# Altium PCB PCB1.PcbDoc
Units mil, origin at the board's own origin, x right, y up, seen from the top; angles counter-clockwise.
Board outline 6000 x 5615 mil, 2 copper layers (Top Layer, Bottom Layer); 144 components, 99 nets, 418 pads, 52 vias.
Unrouted connection lines stored in the file: 1.
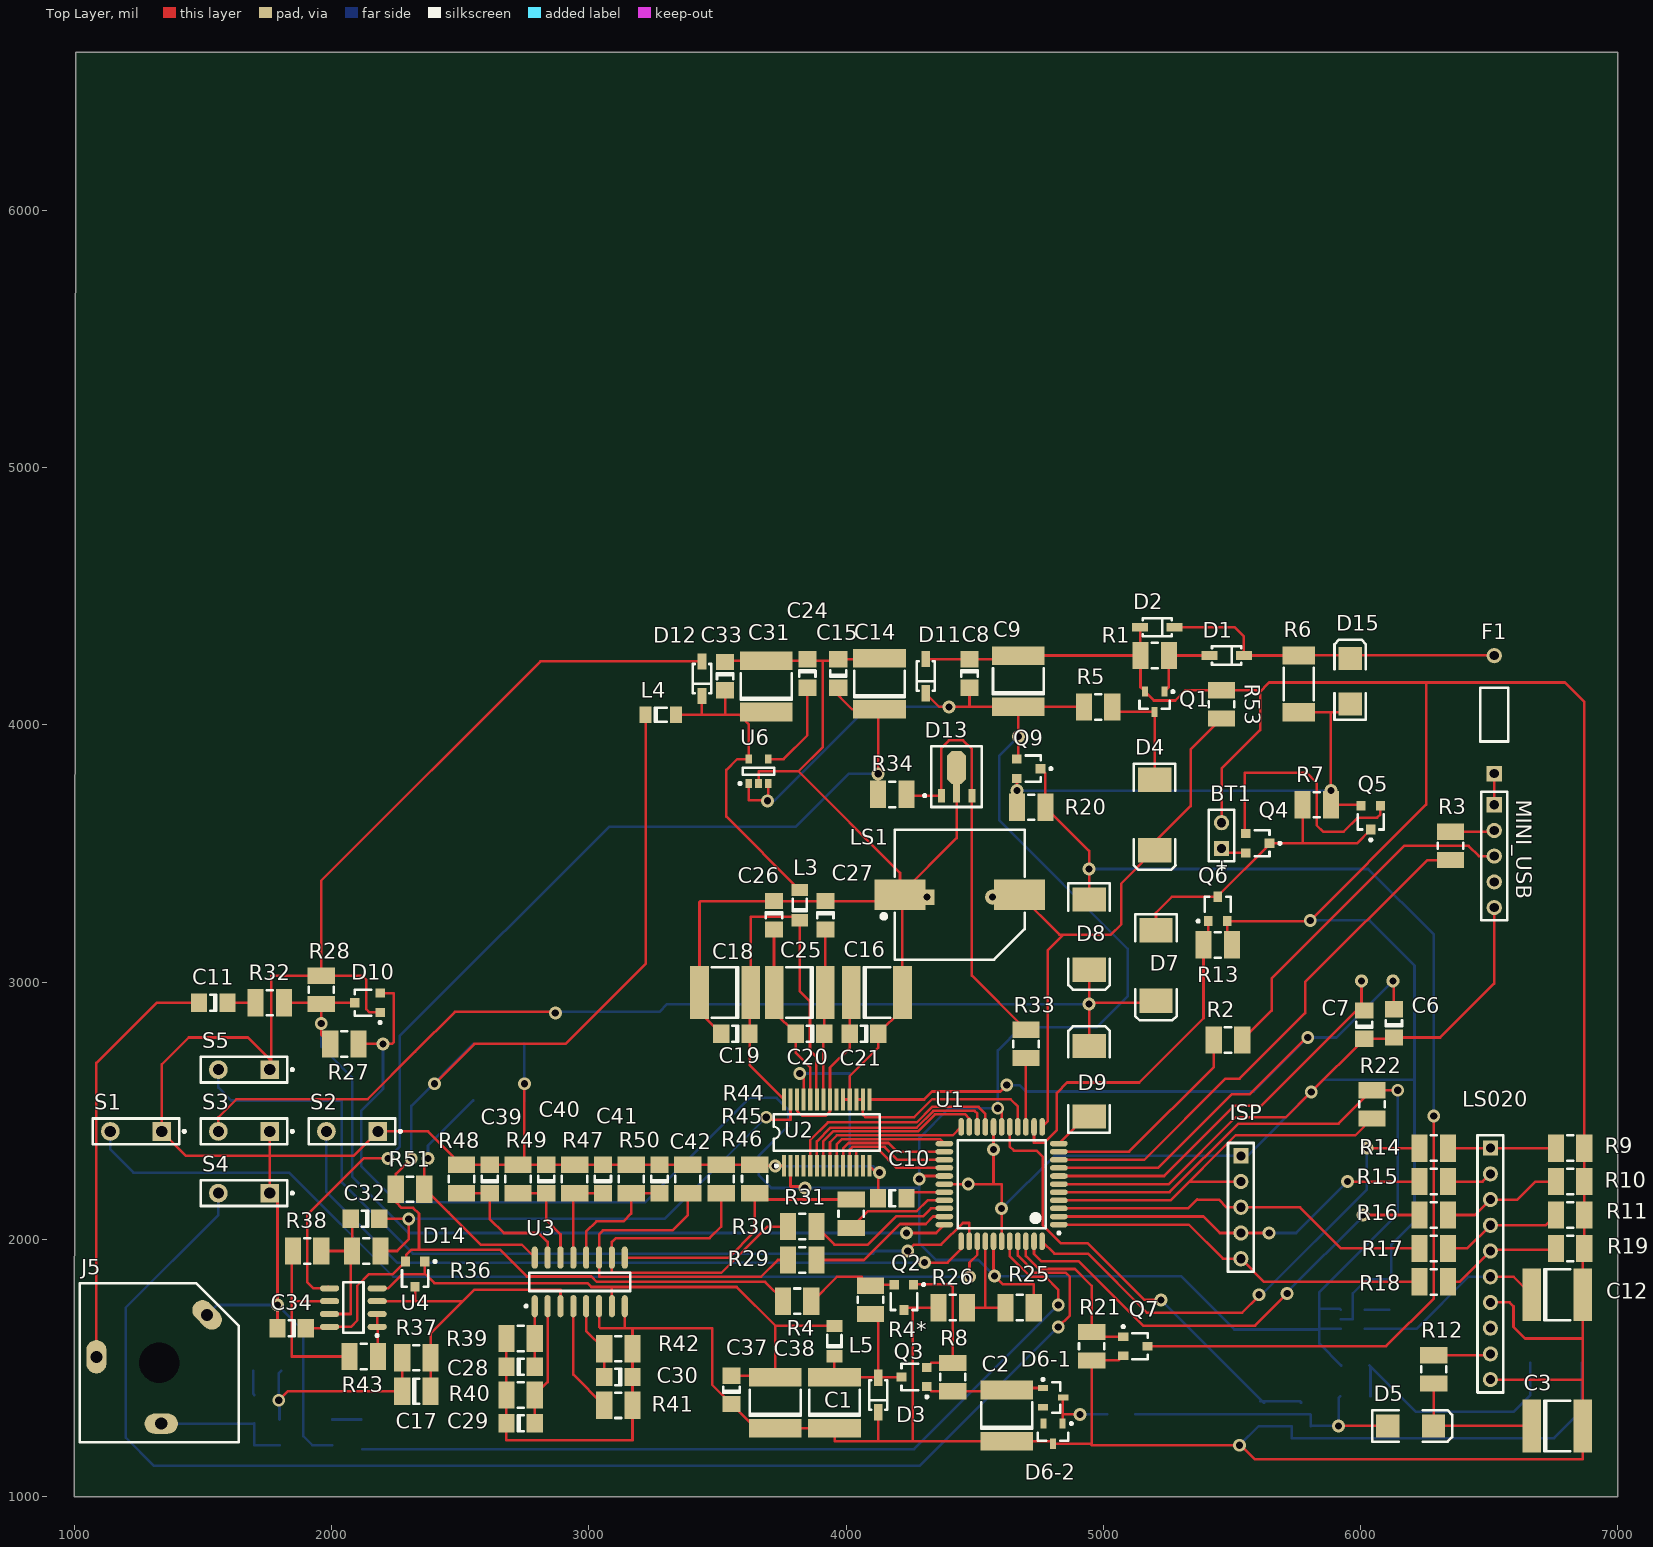
[diagram p0: Top Layer view]
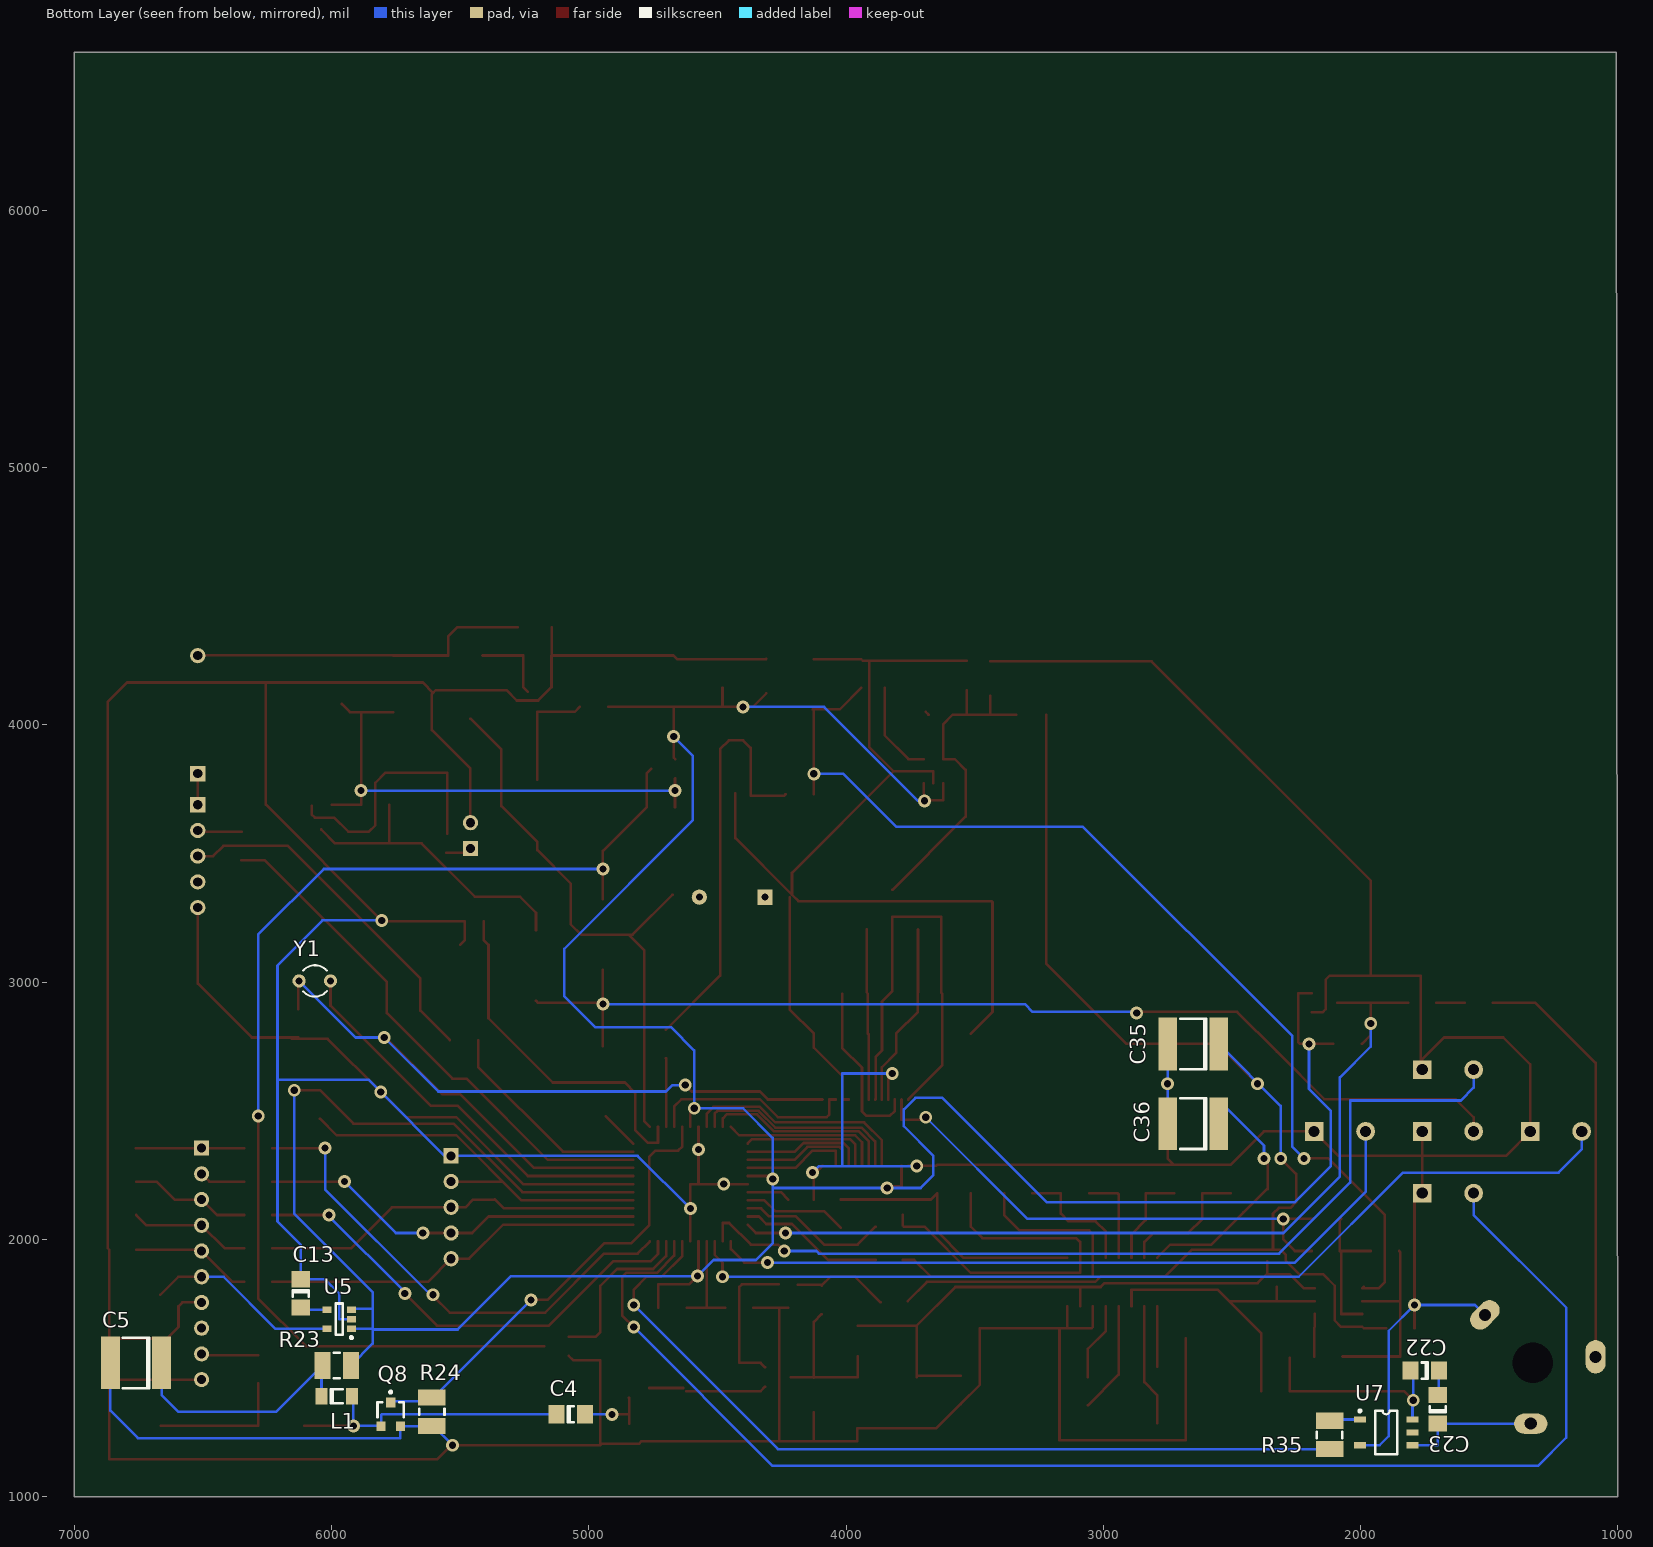
[diagram p1: Bottom Layer view, seen from below]

## Layer stack, top to bottom
Top Layer: signal copper 1.4
Dielectric: dielectric 12.6, FR-4, Dk 4.8
Bottom Layer: signal copper 1.4

## Board outline
1000,1000 7000,1000 7000,6615 1005,6615

## Design rules (kind name [scope] priority, off if disabled: settings)
Clearance [All vs InNet('No Net')] p1: gap=10
ComponentClearance [All] p1: gap=5 collisioncheckmode=3 verticalgap=100000 showdistances=FALSE
Height [All] p1: minheight=0 maxheight=10000 prefheight=5000
HoleToHoleClearance [All] p1: gap=5 allowstackedmicrovias=TRUE
MinimumSolderMaskSliver [All] p1: minsoldermaskwidth=5
PlaneClearance [All] p1: clearance=40
PlaneConnect [All] p1: planeconnectstyle=Relief reliefexpansion=20 reliefentries=4 reliefconductorwidth=20 reliefairgap=20
PolygonConnect [All] p1: connectstyle=Relief reliefconductorwidth=20 reliefentries=4 polygonreliefangle="90 Angle"
RoomDefinition Sheet1 [InComponentClass('Sheet1')] p1: confinementstyle=ConfineIn formatcopy=TRUE lockcomponents=FALSE outline 1000,1130 7195,1130 7195,6595 1000,6595
RoutingVias [All] p1: holewidth=28 width=50 viastyle="Through Hole" minholewidth=28 minwidth=50 maxholewidth=28 maxwidth=50
SilkToSilkClearance [All] p1: silktosilkclearance=5
SilkscreenOverComponentPads [All] p1: minsilkscreentomaskgap=5
SolderMaskExpansion [All] p1: expansion=5
TestPointUsage [All] p1: valid=0 allowmultiple=FALSE
Testpoint [All] p1: side=0 testpointundercomponent=FALSE minsize=40 maxsize=100 preferedsize=60 minholesize=0 maxholesize=40 preferedholesize=32 testpointgrid=1 style=0 order=0-112345678
Width [All] p1: maxlimit=20 minlimit=5 preferedwidth=10
16 further rules are at their usual default settings.

## Components (designator, comment, footprint, x,y, rotation, side; value= is the part's Value field where it differs from the comment)
BT1 "3.7V" BAT-2 5460,3570 r90 top
C1 "Cap Pol3" 2220 3955,1365 r90 top
C2 "Cap Pol3" 2220 4625,1315 r90 top
C3 "Cap Pol3" 2220 6765,1275 r0 top
C4 "Cap Semi" C1206 5070,1320 r180 bottom
C5 "Cap Pol3" 2220 6760,1520 r0 bottom
C6 "Cap Semi" C1206 6130,2840 r90 top
C7 "Cap Semi" C1206 6015,2835 r90 top
C8 "Cap Semi" C1206 4480,4200 r270 top
C9 "Cap Pol3" 2220 4670,4170 r90 top
C10 "Cap Semi" C1206 4180,2160 r0 top
C11 "Cap Semi" C1206 1540,2920 r180 top
C12 "Cap Pol3" 2220 6765,1785 r0 top
C13 "Cap Semi" C1206 6120,1790 r270 bottom
C14 "Cap Pol3" 2220 4130,4160 r90 top
C15 "Cap Semi" C1206 3970,4200 r90 top
C16 "Cap Pol3" 2220 4120,2960 r0 top
C17 "4.5-20pF" C1210 2330,1410 r0 top
C18 "Cap Pol3" 2220 3530,2960 r180 top
C19 "Cap Semi" C1206 3570,2800 r180 top
C20 "Cap Semi" C1206 3860,2800 r180 top
C21 "Cap Semi" C1206 4070,2800 r180 top
C22 "Cap Semi" C1206 1750,1490 r0 bottom
C23 "Cap Semi" C1206 1700,1340 r90 bottom
C24 "Cap Semi" C1206 3850,4200 r270 top
C25 "Cap Pol3" 2220 3820,2960 r180 top
C26 "Cap Semi" C1206 3720,3260 r270 top
C27 "Cap Semi" C1206 3920,3260 r270 top
C28 "Cap Semi" C1206 2735,1505 r0 top
C29 "Cap Semi" C1206 2735,1285 r0 top
C30 "Cap Semi" C1206 3115,1465 r180 top
C31 "Cap Pol3" 2220 3690,4150 r90 top
C32 "Cap Semi" C1206 2130,2080 r180 top
C33 "Cap Semi" C1206 3530,4190 r270 top
C34 "Cap Semi" C1206 1845,1655 r180 top
C35 "Cap Pol3" 2220 2650,2760 r0 bottom
C36 "Cap Pol3" 2220 2650,2450 r0 bottom
C37 "Cap Semi" C1206 3555,1415 r90 top
C38 "Cap Pol3" 2220 3725,1365 r90 top
C39 "Cap Semi" C1206 2615,2235 r90 top
C40 "Cap Semi" C1206 2835,2235 r90 top
C41 "Cap Semi" C1206 3055,2235 r90 top
C42 "Cap Semi" C1206 3275,2235 r90 top
D1 "MMSZ4V7T1" 425 5480,4270 r180 top
D2 "MMSZ5V6T1" 425 5210,4380 r180 top
D3 "MMSZ3V3T1" 425 4125,1395 r90 top
D4 "Diode" SMC 5200,3650 r270 top
D5 "MBR0520" SMB 6195,1275 r0 top
D6-1 "BAT54" SOT23_L 4805,1385 r0 top
D6-2 "BAT54" SOT23_L 4805,1245 r270 top
D7 "Diode" SMC 5205,3065 r270 top
D8 "Diode" SMC 4945,3185 r270 top
D9 "Diode" SMC 4945,2615 r90 top
D10 "BAV99" SOT-23 2140,2920 r90 top
D11 "MMSZ5V1T1" 425 4310,4190 r90 top
D12 "MMSZ3V3T1" 425 3440,4180 r90 top
D13 "TL431CPK" PK03 4430,3780 r0 top
D14 "BAV99" SOT-23 2325,1865 r180 top
D15 "MBR0520" SMB 5960,4170 r90 top
F1 "Fuse 1" PIN-W2/E2.8 6520,4040 r90 top
ISP "Header 5" HDR1X5 5535,2325 r270 top
J5 "Phonejack3" JACK/6-V3 1330,1520 r270 top
L1 "Inductor" 3261 5980,1390 r180 bottom
L3 "Inductor" 3261 3820,3300 r90 top
L4 "Inductor" 3261 3280,4040 r0 top
L5 "Inductor" 3261 3955,1605 r90 top
LS1 "Buzzer" ABSM-1574 4210,3340 r0 top
LS020 "Header 10" HDR1X10 6505,2355 r270 top
MINI_USB "Header 5" HDR1X5 6520,3690 r270 top
Q1 "BC847" SOT23_L 5200,4090 r270 top
Q2 "BC 857" SOT-23B 4225,1775 r180 top
Q3 "BC 857" SOT-23B 4265,1465 r90 top
Q4 "IRLML6402" SOT23#1 5600,3540 r270 top
Q5 "IRLML6402" SOT23#1 6040,3640 r180 top
Q6 "2N7002" SOT23#2 5445,3285 r0 top
Q7 "2N7002" SOT23#2 5125,1585 r270 top
Q8 "IRLML2402" SOT23#1 5770,1320 r180 bottom
Q9 "IRLML6402" SOT23#1 4710,3830 r270 top
R1 "Res3" 3225[1210] 5200,4270 r0 top
R2 "Res3" 3225[1210] 5485,2775 r180 top
R3 "Res3" 3225[1210] 6350,3530 r270 top
R4 "Res3" 3225[1210] 3810,1760 r180 top
R4* "Res3" 3225[1210] 4095,1765 r90 top
R5 "Res3" 3225[1210] 4980,4070 r180 top
R6 "Res3" 6332[2512] 5760,4160 r270 top
R7 "Res3" 3225[1210] 5830,3690 r0 top
R8 "Res3" 3225[1210] 4415,1465 r90 top
R9 "Res3" 3225[1210] 6815,2355 r180 top
R10 "Res3" 3225[1210] 6815,2225 r180 top
R11 "Res3" 3225[1210] 6815,2095 r180 top
R12 "Res3" 3225[1210] 6285,1495 r90 top
R13 "Res3" 3225[1210] 5445,3145 r0 top
R14 "Res3" 3225[1210] 6285,2355 r180 top
R15 "Res3" 3225[1210] 6285,2225 r180 top
R16 "Res3" 3225[1210] 6285,2095 r180 top
R17 "Res3" 3225[1210] 6285,1965 r180 top
R18 "Res3" 3225[1210] 6285,1835 r180 top
R19 "Res3" 3225[1210] 6815,1965 r180 top
R20 "Res3" 3225[1210] 4720,3680 r0 top
R21 "Res3" 3225[1210] 4955,1585 r270 top
R22 "Res3" 3225[1210] 6045,2525 r270 top
R23 "Res3" 3225[1210] 5980,1510 r0 bottom
R24 "Res3" 3225[1210] 5610,1330 r90 bottom
R25 "Res3" 3225[1210] 4675,1735 r0 top
R26 "Res3" 3225[1210] 4415,1735 r0 top
R27 "Res3" 3225[1210] 2050,2760 r0 top
R28 "Res3" 3225[1210] 1960,2970 r270 top
R29 "Res3" 3225[1210] 3830,1920 r180 top
R30 "Res3" 3225[1210] 3830,2050 r180 top
R31 "Res3" 3225[1210] 4020,2100 r90 top
R32 "Res3" 3225[1210] 1760,2920 r180 top
R33 "Res3" 3225[1210] 4700,2760 r90 top
R34 "Res3" 3225[1210] 4180,3730 r180 top
R35 "Res3" 3225[1210] 2120,1240 r270 bottom
R36 "Res3" 3225[1210] 2135,1955 r180 top
R37 "Res3" 3225[1210] 2330,1540 r0 top
R38 "Res3" 3225[1210] 1905,1955 r180 top
R39 "Res3" 3225[1210] 2735,1615 r0 top
R40 "Res3" 3225[1210] 2735,1395 r0 top
R41 "Res3" 3225[1210] 3115,1355 r180 top
R42 "Res3" 3225[1210] 3115,1575 r180 top
R43 "Res3" 3225[1210] 2125,1545 r180 top
R44 "Res3" 3225[1210] 3385,2235 r270 top
R45 "Res3" 3225[1210] 3515,2235 r270 top
R46 "Res3" 3225[1210] 3645,2235 r270 top
R47 "Res3" 3225[1210] 2945,2235 r90 top
R48 "Res3" 3225[1210] 2505,2235 r90 top
R49 "Res3" 3225[1210] 2725,2235 r90 top
R50 "Res3" 3225[1210] 3165,2235 r90 top
R51 "Res3" 3225[1210] 2305,2195 r180 top
R53 "Res3" 3225[1210] 5460,4080 r90 top
S1 "SW-PB" SPST-2 1240,2420 r180 top
S2 "SW-PB" SPST-2 2080,2420 r180 top
S3 "SW-PB" SPST-2 1660,2420 r180 top
S4 "SW-PB" SPST-2 1660,2180 r180 top
S5 "SW-PB" SPST-2 1660,2660 r180 top
U1 "ATmega32-16AI" 44A_N 4605,2215 r180 top
U2 "AD9280" SSOP28 3925,2415 r0 top
U3 "74VHC4051M" M16A_N 2965,1835 r90 top
U4 "MCP6022IM" M08A_L 2085,1735 r180 top
U5 "LP3985IM5-285" MF05A_L 5970,1690 r0 bottom
U6 "LP3985IM5-3.0" MF05A_L 3660,3820 r90 top
U7 "Optoisolator2" SOP5(6) 1900,1250 r270 bottom
Y1 "15MHz" R38 6065,3005 r90 bottom

## Footprints (in the part's own frame and the unit in brackets; to place one, negate y for a bottom-side part, rotate by r counter-clockwise, add the part's x,y. Pads: shape width x height; smd on the part's side, far side on the other; paste and mask are expansions set on the pad)
44A_N [mm] "Thin QFP, 44-Leads, Body 10x10mm, Pitch 0.8mm, IPC Medium Density"
  oval 1.75x0.55 smd: 1(-5.65,4) 2(-5.65,3.2) 3(-5.65,2.4) 4(-5.65,1.6) 5(-5.65,0.8) 6(-5.65,0) 7(-5.65,-0.8) 8(-5.65,-1.6) 9(-5.65,-2.4) 10(-5.65,-3.2) 11(-5.65,-4) 23(5.65,-4) 24(5.65,-3.2) 25(5.65,-2.4) 26(5.65,-1.6) 27(5.65,-0.8) 28(5.65,0) 29(5.65,0.8) 30(5.65,1.6) 31(5.65,2.4) 32(5.65,3.2) 33(5.65,4)
  oval 0.55x1.75 smd: 12(-4,-5.65) 13(-3.2,-5.65) 14(-2.4,-5.65) 15(-1.6,-5.65) 16(-0.8,-5.65) 17(0,-5.65) 19(1.6,-5.65) 20(2.4,-5.65) 21(3.2,-5.65) 22(4,-5.65) 34(4,5.65) 35(3.2,5.65) 36(2.4,5.65) 37(1.6,5.65) 38(0.8,5.65) 39(0,5.65) 40(-0.8,5.65) 41(-1.6,5.65) 42(-2.4,5.65) 43(-3.2,5.65) 44(-4,5.65)
  oval 0.55x1.75 smd paste+0 mask+0.127: 18(0.8,-5.65)
  silkscreen extent -5.77,-4.35 4.35,4.95, body extent -5,-5 5,5, height 1.2
425 [mm] "SOD-123; 2 Leads; Body 2.7 x 1.6 mm, (LxW)"
  rect 1.6x0.85 smd: 1(-1.7,0) 2(1.7,0)
  silkscreen extent -1.45,-0.9 1.45,0.9
2220 [mm] "Chip Capacitor; Body 5.7 x 5.0 mm (LxW typ)"
  rect 1.85x5.2 smd: 1(-2.525,0) 2(2.525,0)
  silkscreen extent -1.3,-2.5 1.3,2.5
3225[1210] [mm] "Chip Resistor; Body 3.2 x 2.5 mm (LxW typ)"
  rect 1.6x2.7 smd: 1(-1.4,0) 2(1.4,0)
  silkscreen extent -0.3,-1.25 0.3,1.25
3261 [mm] "3216 Chip; Chip Inductor; Body 3.2 x 1.6 mm (LxW typ)"
  rect 1.2x1.6 smd: 1(-1.5,0) 2(1.5,0)
  silkscreen extent -0.6,-0.7 0.6,0.7
6332[2512] [mm] "Chip Resistor; Body 6.3 x 3.2 mm (LxW typ)"
  rect 1.8x3.2 smd: 1(-2.8,0) 2(2.8,0)
  silkscreen extent -1.6,-1.5 1.6,1.5
ABSM-1574 [mm] "Magnetic Transducer Buzzer"
  rect 5x3 smd: 1(0,0) 2(11.8,0)
  rect 1.5x1.5 hole 0.7: 1A(2.65,-0.24)
  round 1.5 hole 0.7: 2A(9.15,-0.24)
  silkscreen extent -1.83,-6.4 12.3,6.4
BAT-2 [mm] "Multicell Battery; 2 Leads"
  rect 1.5x1.5 hole 0.9: 1(-1.27,0)
  round 1.5 hole 0.9: 2(1.27,0)
  silkscreen extent -2.54,-1.27 2.54,1.27
C1206 [mm] "Chip Capacitor; Body 3.2 x 1.6 mm (LxW typ)"
  rect 1.6x1.8 smd: 1(-1.4,0) 2(1.4,0)
  silkscreen extent -0.3,-0.8 0.3,0.8
C1210 [mm] "Chip Capacitor; Body 3.2 x 2.5 mm (LxW typ)"
  rect 1.6x2.7 smd: 1(-1.4,0) 2(1.4,0)
  silkscreen extent -0.3,-1.25 0.3,1.25
HDR1X5 [mm] "Connector; Header; 5 Position"
  rect 1.5x1.5 hole 0.9: 1(0,0)
  round 1.5 hole 0.9: 2(2.54,0) 3(5.08,0) 4(7.62,0) 5(10.16,0)
  silkscreen extent -1.27,-1.27 11.43,1.27
HDR1X10 [mm] "Connector; Header; 10 Position"
  rect 1.5x1.5 hole 0.9: 1(0,0)
  round 1.5 hole 0.9: 2(2.54,0) 3(5.08,0) 4(7.62,0) 5(10.16,0) 6(12.7,0) 7(15.24,0) 8(17.78,0) 9(20.32,0) 10(22.86,0)
  silkscreen extent -1.27,-1.27 24.13,1.27
JACK/6-V3 [mm] "Connector; Jack Socket, 1/4\" [6.5mm], Thru-Hole, 3 Position, Vertical, Body 15.7 x 15.7 x 31 mm (WxTxH)"
  oval 2x3.3 hole 1.2: 1(6,0.2)
  oval 3.3x2 hole 1.2: 3(-0.6,-6.2)
  oval 2x3.3 hole 1.2 rot 135: 5(-4.738,4.738)
  round 3.7 hole 4: MH1(0,0)
  silkscreen extent -7.85,-7.85 7.85,7.85
M08A_L [mm] "SOIC, 8-Leads, Body 4.9x3.9mm, Pitch 1.27mm, IPC High Density"
  oval 1.9x0.6 smd: 1(-2.35,1.905) 2(-2.35,0.635) 3(-2.35,-0.635) 4(-2.35,-1.905) 5(2.35,-1.905) 6(2.35,-0.635) 7(2.35,0.635) 8(2.35,1.905)
  silkscreen extent -2.48,-2.5 1,2.88, body extent -2,-2.5 2,2.5, height 1.75
M16A_N [mm] "SOIC, 16-Leads, Body 9.9x3.9mm, Pitch 1.27mm, IPC Medium Density"
  oval 2.2x0.6 smd: 1(-2.4,4.445) 2(-2.4,3.175) 3(-2.4,1.905) 4(-2.4,0.635) 5(-2.4,-0.635) 6(-2.4,-1.905) 7(-2.4,-3.175) 8(-2.4,-4.445) 9(2.4,-4.445) 10(2.4,-3.175) 11(2.4,-1.905) 12(2.4,-0.635) 13(2.4,0.635) 14(2.4,1.905) 15(2.4,3.175) 16(2.4,4.445)
  silkscreen extent -2.52,-5 0.9,5.42, body extent -1.95,-4.95 1.95,4.95, height 1.75
MF05A_L [mm] "SOT23, 5-Leads, Body 2.9x1.6mm, Pitch 0.95mm, Lead Span 2.8mm, IPC High Density"
  rect 0.9x0.65 smd: 1(-1.2,0.95) 2(-1.2,0) 3(-1.2,-0.95) 4(1.2,-0.95) 5(1.2,0.95)
  silkscreen extent -1.32,-1.55 0.35,1.95, body extent -0.9,-1.55 0.9,1.55, height 1.22
PIN-W2/E2.8 [mm] "Fuse; 2 Leads"
  rect 1.5x1.5 hole 0.9: 1(-5.825,0)
  round 1.5 hole 0.9: 2(5.825,0)
  silkscreen extent -2.65,-1.4 2.65,1.4
PK03 [mm] "SOT-89; Body 4.6 x 4.25 mm, inc. leads (LxW max)"
  oct 1.9x3.3 smd: 0(0,1.388)
  rect 0.7x1.35 smd: 1(-1.5,-1.388) 3(1.5,-1.388)
  rect 0.7x1.8 smd: 2(0,-1.162)
  silkscreen extent -3.27,-2.51 2.5,3.49
R38 [mm] "Crystal, Thru-Hole; 2 Leads; Body 3.1 x 8.2 mm (Dia.xH)"
  round 1.3 hole 0.7: 1(0,1.55) 2(0,-1.55)
  silkscreen extent -1.55,-1.19 1.55,1.17
SMB [mm] "DO-214-AA/SMB; 2 C-Bend Leads; Body 5.3 x 3.6 mm, inc. leads (LxW)"
  rect 2.3x2.3 smd: 1(-2.25,0) 2(2.25,0)
  silkscreen extent -3.8,-1.55 4.1,1.55
SMC [mm] "DO-214-AB/SMC; 2 C-Bend Leads; Body 7.9 x 5.9 mm, inc. leads (LxW)"
  rect 2.4x3.3 smd: 1(-3.475,0) 2(3.475,0)
  silkscreen extent -5.07,-2.05 5.43,2.05
SOP5(6) [mm] "Small Outline; 6 Leads (1 Absent); Body Width 4.4 mm; Pitch 1.27 mm"
  rect 0.6x1.2 smd: 1(-1.27,-2.6) 3(1.27,-2.6) 4(1.27,2.6) 5(0,2.6) 6(-1.27,2.6)
  silkscreen extent -2.24,-2.72 2.15,1.1
SOT23#1 [mm] "SOT-23; 3 Leads; Body 3.1 x 2.5 mm, inc. leads (LxW max), Alternate Lead Configuration"
  rect 0.9x0.95 smd: 1(0,1.175) 2(0.95,-1.175) 3(-0.95,-1.175)
  silkscreen extent -1.3,-0.3 1.3,2.33
SOT23#2 [mm] "SOT-23; 3 Leads; Body 3.0 x 2.5 mm, inc. leads (LxW max)"
  rect 0.85x1 smd: 1(-0.95,-1.2) 2(0.95,-1.2) 3(0,1.2)
  silkscreen extent -2.05,-1.32 1.28,1.2
SOT23_L [mm] "SOT23, 3-Leads, Body 2.9x1.3mm, Pitch 0.95mm, Lead Span 2.3mm, IPC High Density"
  rect 1x0.6 smd: 1(-1,0.95) 2(-1,-0.95) 3(1,0)
  silkscreen extent -1.12,-1.5 0.7,1.92, body extent -0.7,-1.5 0.7,1.5, height 1.1
SOT-23 [mm] "SOT-23; 3 Leads; Body 3.0 x 2.6 mm, inc. leads (LxW max)"
  rect 0.9x0.95 smd: 1(-0.95,-1.25) 2(0.95,-1.25) 3(0,1.25)
  silkscreen extent -2.07,-1.38 1.3,1.25
SOT-23B [mm] "SOT-23; 3 Leads; Body 3.0 x 2.6 mm, inc. leads (LxW max)"
  rect 0.9x0.95 smd: 1(-0.95,-1.25) 2(0.95,-1.25) 3(0,1.25)
  silkscreen extent -2.08,-1.37 1.3,1.25
SPST-2 [mm] "Circuit Breaker; 2 Leads"
  rect 1.85x1.85 hole 1.1: 1(-2.54,0)
  round 1.85 hole 1.1: 2(2.54,0)
  silkscreen extent -4.89,-1.27 4.28,1.27
SSOP28 [mm] "SSOP, Plastic; 28 Leads; Body Width 5.3 mm; Pitch 0.65 mm"
  rect 0.4x2.15 smd: 1(-4.225,-3.275) 2(-3.575,-3.275) 3(-2.925,-3.275) 4(-2.275,-3.275) 5(-1.625,-3.275) 6(-0.975,-3.275) 7(-0.325,-3.275) 8(0.325,-3.275) 9(0.975,-3.275) 10(1.625,-3.275) 11(2.275,-3.275) 12(2.925,-3.275) 13(3.575,-3.275) 14(4.225,-3.275) 15(4.225,3.275) 16(3.575,3.275) 17(2.925,3.275) 18(2.275,3.275) 19(1.625,3.275) 20(0.975,3.275) 21(0.325,3.275) 22(-0.325,3.275) 23(-0.975,3.275) 24(-1.625,3.275) 25(-2.275,3.275) 26(-2.925,3.275) 27(-3.575,3.275) 28(-4.225,3.275)
  silkscreen extent -5.25,-3.4 5.25,1.8

## Part data
BT1: library part Battery, "Multicell Battery"
C1 C2 C3 C5 C9 C12 C14 C16 C18 C25 C31 C35 C36 C38: "Polarized Capacitor (Surface Mount)"
C4 C6 C7 C8 C10 C11 C13 C15 C19 C20 C21 C22 C23 C24 C26 C27 C28 C29 C30 C32 C33 C34 C37 C39 C40 C41 C42: "Capacitor (Semiconductor SIM Model)"
C17: library part "Cap Var", "Variable or Adjustable Capacitor"
D1 D2 D3 D11 D12: "Surface Mount Silicon Zener Diode"
D4 D7 D8 D9: "Default Diode"
D5 D15: library part "D Schottky", "Schottky Diode"
D6-1 D6-2: "Schottky Barrier Diode"
D10 D14: "Silicon Switching Diode Array for High-Speed Switching"
D13: "Adjustable Precision Shunt Regulator"
F1: "Fuse"
ISP: library part "Header 5X2", "Header, 5-Pin, Dual row"
J5: "Jack Socket, 1/4\" [6.5mm], Thru-Hole, Vertical, 3-Conductor Open Circuit (Non-Normalling)"
LS1: "Magnetic Transducer Buzzer"
LS020: "Header, 10-Pin"
MINI_USB: "Header, 5-Pin"
Q1: "NPN General-purpose Transistor"
Q2 Q3: library part PNP, "PNP Bipolar Transistor"
Q4 Q5 Q9: library part MOSFET-P, "P-Channel MOSFET"
Q6 Q7 Q8: library part MOSFET-N, "N-Channel MOSFET"
R1 R2 R3 R4 R4* R5 R6 R7 R8 R9 R10 R11 R12 R13 R14 R15 R16 R17 R18 R19 R20 R21 R22 R23 R24 R25 R26 R27 R28 R29 R30 R31 R32 R33 R34 R35 R36 R37 R38 R39 R40 R41 R42 R43 R44 R45 R46 R47 R48 R49 R50 R51 R53: "Resistor"
S1 S2 S3 S4 S5: "Switch"
U1: "8-Bit AVR Microcontroller with 32K Bytes of In-System Programmable Flash Memory"
U3: "8-Channel Analog Multiplexer"
U4: library part LMC6022IM, "Low Power CMOS Dual Operational Amplifier"
U5 U6: "Micropower, 150mA Low-Noise Ultra Low-Dropout CMOS Voltage Regulator"
U7: "5 Pin Mini Flat Pack Optocoupler"
Y1: library part XTAL, "Crystal Oscillator"

## Via types
v1: diameter 50, hole 28, Top Layer to Bottom Layer, 52 vias

## Nets (pads, with @x,y where several pads share a name; then routed paths per layer and width w, separated by ;. In a path a pad name is that pad's centre, name@x,y a point inside that pad or via, vN(x,y) a via of type N, cw(c..) or ccw(c..) an arc to the next point about the centre after c; other vN are vias at no path point)
+2.8V: C12.1 LS020.6 U5.5 | length 761.2
  Top Layer w10: LS020.6 6595.59,1855 C12.1
  Bottom Layer w10: U5.5 6217.6,1652.6 6420,1855 LS020.6
+3V: C34.1 C35.1 D14.2 L4.1 R4.2 R51.2 U4.8 | length 5126
  Top Layer w10: C34.1 U4.8@1987.48,1655 ; U4.8 2075,1660 2100,1685 2100,1820 2145,1865 2238.39,1865 D14.2 2290,1916.61 2290,1940 2310,1960 2340,1960 ; v1(2310,2315) 2249.88,2254.88 R51.2 2249.88,2145.12 2272.41,2122.59 2317.41,2122.59 2340,2100 2340,1960 ; v1(2400,2605) 2555,2760 2910,2760 3220.94,3070.94 L4.1 ; R4.2@3760,1760 3685,1835 3030.99,1835 3010,1855.99 2759.01,1855.99 2701.46,1913.54 2655,1960 2340,1960
  Bottom Layer w10: v1(2310,2315) 2310,2519.41 C35.1
-3V: C1.2 D3.2 L5.1 Q3.3 R4*.1 | length 602.1
  Top Layer w10: L5.1 C1.2 D3.2@4125,1464.41 ; R4*.1 4125,1679.88 D3.2@4125,1464.41 ; D3.2 D3.2@4125,1464.41 ; Q3.3@4215.2,1464.41 D3.2@4125,1464.41
ADC_EN: U1.15 U2.16 U2.17 | length 811.5
  Top Layer w10: U2.17 U2.16 4065.75,2484.25 4075,2475 4265,2475 4335,2545 4640,2545 4667.99,2517.01 U1.15
BAT: R25.1 R26.2 U1.37 | length 405.3
  Top Layer w10: R26.2 R25.1 ; 4542.01,1737.01 U1.37
CH_OK: D4.2 LS1.2 LS1.2A R53.1 U1.12 | length 2219.4
  Top Layer w10: LS1.2 4829.57,3185 4845,3185 ; U1.12 4785,2459.96 4785,3125 4845,3185 ; R53.1 5340,3904.88 5340,3685 5200,3545 D4.2 5070,3383.19 5070,3225 5030,3185 4845,3185
CH_ON: Q6.1 R13.1 U1.13 | length 1390.9
  Top Layer w10: U1.13 4730.98,2375.98 4770.98,2375.98 4820,2425 4820,2570 4860,2610 5140,2610 5389.88,2859.88 R13.1 5407.6,3162.72 Q6.1
CLK: ISP.3 R17.2 U1.3 | length 1496.3
  Top Layer w10: U1.3 5329.49,2120.51 5365,2156.02 5366.02,2155 5450,2155 5480,2125 ISP.3 5765,2125 5925,1965 R17.2
CS: R16.2 U1.43 | length 1847
  Top Layer w10: U1.43 4730.98,1944.02 4760,1915 4905,1915 5155,1665 5590,1665 v1(5715,1790) ; v1(6010,2095) R16.2
  Bottom Layer w10: v1(5715,1790) 5715,1795 6010,2090 v1(6010,2095)
DATA: ISP.5 R18.2 U1.1 | length 1494.6
  Top Layer w10: U1.1 5332.48,2057.52 5465,1925 ISP.5 5625,1835 R18.2
DC_AC: R35.2 U1.40 | length 3307
  Top Layer w10: U1.40@4636.5,1981.59 U1.40 4636.5,1936.5 4717.99,1855 4775,1855 4825,1805 v1(4825,1745)
  Bottom Layer w10: R35.2 4264.88,1184.88 v1(4825,1745)
DOWN: S4.2 U1.41 | length 5503.5
  Top Layer w10: U1.41 4667.99,1937.01 4735,1870 4855,1870 4870,1855 4870,1705 v1(4825,1660)
  Bottom Layer w10: S4.2@1560,2185 1560,2095 1200,1735 1200,1230 1310,1120 4285,1120 v1(4825,1660)
GND: BT1.2 C1.1 C2.1 C3.2 C5.2 C6.1 C7.1 C8.1 C9.2 C10.1 C12.2 C13.1 C14.2 C15.2 C16.2 C18.2 C19.2 C21.1 C24.1 C26.1 C27.1 C28.1 C29.1 C30.1 C31.2 C33.1 C34.2 C35.2 C36.2 C37.1 C38.1 C39.2 C40.2 C41.2 C42.2 D2.2 D3.1 D6-2.3 D10.1 D11.2 D12.2 D13.2 ISP.1 J5.5 LS1.1 LS1.1A LS020.7 LS020.10 MINI_USB.5 Q1.2 Q2.3 Q6.2 Q7.2 Q8.2 R1.1 R9.1 R10.1 R11.1 R13.2 R19.1 R21.2 R24.1 R26.1 R28.1 R39.1 R40.1 R41.1 R42.1 R44.1 R45.1 R46.1 R47.2 R48.2 R49.2 R50.2 R53.2 S1.1 S2.1 S3.1 S4.1 S5.1 U1.6 U1.18 U1.28 U1.39 U2.1 U2.14 U2.18 U2.19 U2.25 U3.6 U3.8 U5.2 U6.2 U7.3 | length 38848.2
  Top Layer w10: S3.1 1760,2325 ; C34.2 v1@1789.88,1745 ; v1(1790,1745) 1790,2150 S4.1 1760,2325 ; D10.1 2147.6,2882.6 2135,2895.2 2135,3010 2119.88,3025.12 R28.1 ; R39.1 C28.1 R40.1 C29.1 2679.88,1220.12 3169.88,1220.12 R41.1@3169.88,1354.76 ; v1(2750,2605) 2750,2315.12 R49.2 ; U3.6 3040,1660 3045,1655 3140,1655 ; U3.8 3140,1655 ; R41.1 C30.1 R42.1 3170.12,1655 ; D12.2 2811.93,4246.93 1960,3395 R28.1 ; C19.2 3430.59,2884.29 C18.2 3430.59,3310.59 3435.12,3315.12 C26.1 C27.1 4185.12,3315.12 LS1.1 ; C33.1@3530,4249.41 C31.2 ; C31.2@3615.71,4249.41 C31.2 ; R46.1 R45.1 R44.1 C42.2 R50.2 C41.2 R47.2 C40.2 R49.2 ; R46.1@3649.06,2286.06 U2.1 ; U6.2 3660,3820 3815,3820 ; v1(3820,2645) 3835.43,2629.57 U2.25 ; 3934.29,4249.41 3910,4249.41 ; C15.2@3940,4255.12 C14.2@4125.71,4255.12 ; U2.19 U2.18 4014.57,2634.57 4125.12,2745.12 C21.1 4219.41,2894.29 C16.2 LS1.1@4219.41,3330.59 ; U2.14 4125,2252.4 C10.1@4125,2155 ; D3.1 4125,1215.59 ; Q2.3@4225,1735 4260,1735 ; 4260,1220 4260,1735 ; D11.2 4311.81,4255.12 4655.71,4255.12 4670.59,4270 R1.1 ; R26.1 4260,1735 ; U1.28 v1(4475,2215) 4573.5,2215 ; D13.2 4430,3560 LS1.1 ; U1.18 v1(4573.5,2350) 4573.5,2215 ; U1.39 v1(4605,2120) 4605,2215 4573.5,2215 ; U1.6 5255,2215 5515,2475 5710.12,2475 v1(5808.56,2573.44) C7.1 C6.1@6155,2779.88 ; Q7.2 5060.04,1529.88 R21.2 4955,1200.63 ; D2.2 5143.07,4271.81 R1.1 ; BT1.2 5460,3830 5610,3980 5610,4120 5605,4125 ; R13.2 5482.4,3162.72 Q6.2 5802.76,3237.76 v1(5805,3240) 6255,3690 6255,4165 ; C6.1 6309.88,2784.88 6520,2995 MINI_USB.5 ; LS020.10 6864.41,1455 ; LS020.7 6580,1755 6595,1740 6595,1660 6640,1615 6864.41,1615 ; R19.1@6864.41,1959.29 C12.2 6864.41,1615 ; R11.1@6869.74,2089.47 6870.12,2090 R11.1 ; R19.1 R11.1 ; 1760,2325 1435,2325 S1.1 1340,2680 1445,2785 1675,2785 1760,2700 S5.1 1764.88,2664.88 1764.88,3025.12 R28.1 ; 1760,2325 2085,2325 S2.1 2375.12,2420 R48.2 C39.2 R49.2 ; 3140,1655 3480,1655 3480,1434.88 C37.1 3649.29,1265.59 C38.1 C1.1 3955.59,1265 3955.59,1215.59 4125,1215.59 ; C31.2 3770,4249.41 3910,4249.41 ; 3815,3820 4210,3425 LS1.1 ; 3815,3820 3910,3915 3910,4249.41 ; 4125,1215.59 C2.1 4795.04,1215.59 D6-2.3 4950,1205.63 4955,1200.63 ; 4955,1200.63 5534.37,1200.63 5590,1145 6864.41,1145 C3.2 6864.41,1455 ; R1.1 5144.88,4147.09 Q1.2 5196.97,4095 5280,4095 5320.12,4135.12 R53.2 5594.88,4135.12 5605,4125 ; 5605,4125 5645,4165 6255,4165 ; 6255,4165 6795,4165 6870.12,4089.88 R9.1 R10.1 R11.1 ; 6864.41,1455 6864.41,1615
  Bottom Layer w10: J5.5 1555,1745 v1(1790,1745) 1890,1645 1890,1235 1925,1200 U7.3 ; C36.2@2749.41,2540 C35.2 ; v1(3725,2285) 4015,2285 ; v1(3820,2645) 4015,2645 4015,2285 ; v1(4130,2260) 4105,2285 4015,2285 ; v1(4605,2120) 4810,2325 ISP.1 5560.12,2325 v1(5808.56,2573.44) 5855.12,2620 6210,2620 ; v1(5530,1200) 5603.74,1273.74 Q8.2 5732.6,1227.4 6752.4,1227.4 6859.41,1334.41 C5.2 ; v1(5805,3240) 6035,3240 6210,3065 6210,2620 ; U5.2 5970,1690 5970,1790 6025.12,1845.12 C13.1 6120,1980 6210,2070 6210,2620
LEFT: S1.2 U1.36 | length 3765.2
  Top Layer w10: v1(4480,1855) 4480,1910 4510.51,1940.51 U1.36
  Bottom Layer w10: S1.2 1140,2350 1230,2260 1835,2260 2240,1855 v1(4480,1855)
MENU: D7.2 D8.2 D9.2 S3.2 | length 4184.1
  Top Layer w10: S3.2 1560,2475 1630,2545 2140,2545 2325,2730 2480,2885 v1@2870,2885 ; D9.2 v1@4945,2920 ; D8.2 v1@4945,2920 ; D7.2 5196.81,2920 v1@4945,2920
  Bottom Layer w10: v1(2870,2880) 2875,2885 3275,2885 3305,2915 v1(4945,2915)
NetBT1_1: BT1.1 Q4.2 | length 100.9
  Top Layer w10: BT1.1 5477.4,3502.6 Q4.2
NetC2_2: C2.2 D6-1.1 Q3.1 R8.1 | length 446.2
  Top Layer w10: Q3.1 4331.93,1409.88 R8.1 C2.2@4620.47,1409.88 ; C2.2@4632.99,1422.4 D6-1.1
NetC3_1: C3.1 D5.2 R12.1 | length 542.6
  Top Layer w10: R12.1 6285,1276.42 C3.1@6664.17,1276.42
NetC4_1: C4.1 D5.1 L1.2 Q8.3 | length 1142.4
  Top Layer w10: v1(5915,1275) D5.1
  Bottom Layer w10: C4.1 5805,1320 5807.4,1317.6 Q8.3 ; Q8.3@5808.66,1275 v1(5915,1275) 5915,1384.06 L1.2
NetC4_2: C4.2 D6-1.3 D6-2.1 | length 273.9
  Top Layer w10: D6-2.1 4842.4,1320 ; D6-1.3 4842.4,1383.03 4842.4,1320 ; v1(4910,1320) 4842.4,1320
  Bottom Layer w10: v1(4910,1320) C4.2
NetC5_1: C5.1 L1.1 R23.2 | length 967.7
  Bottom Layer w10: R23.2 R23.2@6039.06,1506.06 ; L1.1 R23.2@6039.06,1506.06 ; C5.1 6660.59,1395.59 6595,1330 6215.12,1330 R23.2@6039.06,1506.06
NetC7_2: C7.2 U1.7 Y1.2 | length 1547
  Top Layer w10: U1.7 5236.5,2246.5 5510,2520 5615,2520 6003.98,2908.98 Y1.2
NetC10_2: C10.2 U1.29 | length 169.4
  Top Layer w10: C10.2@4225,2155 4253.5,2183.5 U1.29
NetC11_1: C11.1 R32.2 | length 109.8
  Top Layer w10: C11.1 R32.2
NetC11_2: C11.2 J5.3 | length 1638.2
  Top Layer w10: J5.3 1085.91,2685.91 1320,2920 C11.2
NetC13_2: C13.2 U5.4 | length 95.3
  Bottom Layer w10: U5.4 C13.2@6112.52,1727.4
NetC14_1: C14.1 C15.1 R34.2 U4.5 | length 4104.8
  Top Layer w10: U4.5@1987.48,1815 U4.5 1930,1810 1905,1835 1905,2095 2125,2315 v1(2220,2315) ; C15.1@3940,4144.88 4024.29,4060.59 C14.1 4124.88,4055.47 R34.2
  Bottom Layer w10: v1(2220,2315) 2265,2360 2265,2790 3080,3605 3805,3605 4010,3810 v1(4125,3810)
NetC16_1: C16.1 C21.2 U2.21 U2.26 | length 675.9
  Top Layer w10: U2.26 3809.84,2500.15 3830,2480 3920,2480 3937.8,2497.8 U2.21 3937.8,2667.8 4014.88,2744.88 C21.2 C16.1@4014.88,2954.29
NetC17_1: C17.1 C22.2 R37.1 U7.6 | length 819.7
  Top Layer w10: v1(1795,1375) 1830,1410 C17.1 R37.1
  Bottom Layer w10: U7.6 1797.64,1372.36 v1(1795,1375) 1795,1479.88 C22.2
NetC17_2: C17.2 D14.3 R37.2 U3.3 U4.3 | length 1250.8
  Top Layer w10: U4.3 2325,1760 ; D14.3 2325,1760 ; C17.2 R37.2 2385.12,1635.12 2555,1805 2890,1805 U3.3 ; 2507.67,1760 2325,1760
NetC18_1: C18.1 C19.1 L3.1 U2.23 U2.28 | length 1689.8
  Top Layer w10: C18.1@3625.12,2955.71 C19.1 3625.12,2677.48 U2.28 ; C18.1 3629.41,3254.41 3819.41,3254.41 3819.41,2965.59 3860,2925 3860,2735 3885,2710 3885,2545.55 U2.23
NetC20_1: C20.1 C25.1 C27.2 U2.22 | length 653.1
  Top Layer w10: U2.22 C20.1@3912.2,2797.09 ; C20.1 C25.1@3915.12,2955.71 ; C25.1@3920,2960.59 C27.2
NetC20_2: C20.2 C25.2 C26.2 U2.24 | length 718.5
  Top Layer w10: C25.2@3720,2960.59 C26.2 ; C25.2 3720.59,2884.29 C20.2 3804.88,2725.12 3861.02,2668.98 U2.24
NetC22_1: C22.1 C23.2 | length 97
  Bottom Layer w10: C22.1 1694.88,1400.24 C23.2
NetC23_1: C23.1 J5.1 U7.4 | length 543.5
  Bottom Layer w10: J5.1 C23.1@1698.9,1283.78 ; C23.1 1700,1200 U7.4
NetC24_2: C24.2 U6.4 | length 375.9
  Top Layer w10: U6.4 3757.24,3867.24 3850,3960 C24.2
NetC31_1: C31.1 C33.2 D12.1 L3.2 L4.2 U6.5 | length 1306.3
  Top Layer w10: L4.2 3440,4040 ; D12.1 3440,4040 ; C33.2 3530,4040 ; C31.1@3679.41,4040 C31.1 ; L3.2 3535,3644.06 3535,3825 3577.24,3867.24 U6.5 3622.6,4002.4 3585,4040 3530,4040 ; 3440,4040 3530,4040
NetC32_1: C32.1 R36.1 U2.27 | length 2055.4
  Top Layer w10: C32.1 2295,2080 v1@2300,2075 ; R36.1 2255,1955 2300,2000 v1@2300,2075 ; v1(2300,2080) v1@2300,2075 ; v1(3690,2475) 3699.25,2465.75 3784.25,2465.75 U2.27
  Bottom Layer w10: v1(2300,2080) 3295,2080 v1(3690,2475)
NetC32_2: C32.2 R36.2 R38.1 U4.7 | length 576.4
  Top Layer w10: R38.1 R36.2 ; U4.7 2075,1710 2075,1950.12 R36.2 ; C32.2 2079.88,2075 R36.2
NetC36_1: C36.1 R51.1 U3.16 | length 963.8
  Top Layer w10: R51.1@2360,2194.88 2365.12,2194.88 2455,2105 2580,1980 2739.49,1980 U3.16 ; R51.1 2360.12,2300.12 v1(2375,2315)
  Bottom Layer w10: v1(2375,2315) 2375,2364.41 C36.1@2550.59,2540
NetC37_2: C37.2 C38.2 D14.1 L5.2 U3.7 U4.4 | length 2402.7
  Top Layer w10: U4.4 2220,1810 2275,1865 2362.4,1865 ; D14.1 2362.4,1867.6 2400,1830 2995,1830 3010,1815 3090,1815 ; U3.7@3090,1765 U3.7 3090,1815 ; C37.2 3719.29,1470.12 C38.2 3725,1665 3575,1815 3090,1815 ; 3725,1664.06 L5.2
NetD1_1: D1.1 D2.1 D15.2 F1.2 R6.1 | length 1330.6
  Top Layer w10: D2.1 5510,4380 5546.93,4343.07 D1.1 5759.76,4270 R6.1 F1.2@6519.09,4270.24
NetD1_2: D1.2 Q1.1 R1.2 | length 305.9
  Top Layer w10: Q1.1 5255.12,4147.09 R1.2 D1.2
NetD4_1: D4.1 Q1.3 R5.1 | length 436.7
  Top Layer w10: R5.1 5054.49,4050.63 Q1.3 D4.1
NetD7_1: D7.1 Q4.1 Q5.1 Q6.3 R7.1 | length 1187.2
  Top Layer w10: D7.1 5205,3270 5267.24,3332.24 5442.24,3332.24 5650,3540 5986.26,3540 Q5.1 ; 5774.88,3540.12 R7.1
NetD8_1: D8.1 Q7.3 Q9.1 R20.2 | length 4636.4
  Top Layer w10: Q9.1 4775.12,3811.14 R20.2 4945,3510.12 D8.1 ; Q7.3 6100,1585 6285,1770 v1(6285,2480)
  Bottom Layer w10: v1(4945,3440) 6030,3440 6285,3185 v1(6285,2480)
NetD13_1: D13.1 D13.3 R33.2 R34.1 | length 1645.8
  Top Layer w10: R34.1 4239.74,3725.37 D13.1 4370.94,3910.94 4400,3940 4455,3940 4489.06,3905.94 D13.3 4489.06,3026.06 R33.2
NetD15_1: D15.1 Q5.2 Q9.2 R6.2 R7.2 R20.1 | length 2019.7
  Top Layer w10: Q9.2 4664.88,3791.46 R20.1 ; R6.2 5885.12,4049.76 ; D15.1 5928.35,4049.76 5885.12,4049.76 ; Q5.2@5998.86,3690 R7.2 5885.12,4049.76
  Bottom Layer w10: v1(4665,3745) v1(5885,3745)
NetF1_1: F1.1 MINI_USB.1 | length 120.7
  Top Layer w10: MINI_USB.1 F1.1
NetLS020_1: LS020.1 R9.2 R14.1 | length 419.9
  Top Layer w10: R14.1 R9.2@6760,2355
NetLS020_2: LS020.2 R15.1 | length 177.3
  Top Layer w10: R15.1 6475,2225 LS020.2
NetLS020_3: LS020.3 R10.2 R16.1 | length 473.6
  Top Layer w10: R16.1 6445,2095 LS020.3 6609.88,2155 6679.88,2225 R10.2
NetLS020_4: LS020.4 R11.2 R17.1 | length 473.6
  Top Layer w10: R17.1 6415,1965 LS020.4 6695.55,2055 6719.88,2055 R11.2
NetLS020_5: LS020.5 R18.1 R19.2 | length 471.5
  Top Layer w10: R18.1 6385,1835 LS020.5 6510,1960 R19.2@6759.88,1960
NetLS020_9: LS020.9 R12.2 | length 222
  Top Layer w10: R12.2 6500.12,1550.12 LS020.9
NetMINI_USB_2: MINI_USB.2 R3.1 | length 165.1
  Top Layer w10: R3.1 MINI_USB.2@6515.12,3585.12
NetMINI_USB_3: MINI_USB.3 R2.1 | length 1382.5
  Top Layer w10: R2.1 5655,2889.88 5655,3015 6170,3530 6420,3530 6460,3490 MINI_USB.3
NetQ2_1: Q2.1 Q3.2 R8.2 | length 569.7
  Top Layer w10: Q2.1@4262.4,1825 4405,1825 4415,1815 4415,1630 ; Q3.2 4331.93,1520.12 R8.2 4415,1630 ; 4415,1620 4415,1630
NetQ2_2: Q2.2 R4*.2 R4.1 | length 374.4
  Top Layer w10: R4.1@3865,1755 3965,1855 4060.12,1855 R4*.2 ; R4*.2@4099.09,1824.21 Q2.2
NetQ4_1: Q4.3 Q5.3 | length 1018.7
  Top Layer w10: Q4.3@5550,3577.4 5550,3815 5790,3815 5830,3775 5830,3610 5855,3585 5935,3585 5990,3640 6065,3640 6077.4,3652.4 Q5.3
NetQ8_2: Q8.1 R24.2 U1.16 | length 1789.3
  Top Layer w10: U1.16 4636.5,2361.5 4652.99,2345 4740,2345 4765,2320 4765,2055 4835,1985 4940,1985 5160,1765 v1(5225,1765)
  Bottom Layer w10: v1(5225,1765) R24.2@5625,1365 ; R24.2@5610,1370.12 Q8.1@5765.12,1370.12 ; Q8.1@5768.74,1365 Q8.1
NetR29_1: R29.1 U1.32 | length 567.4
  Top Layer w10: R29.1 4070,1920 4210,2060 4310,2060 4339.02,2089.02 U1.32
NetR30_1: R30.1 U1.31 | length 584.6
  Top Layer w10: R30.1 3955.12,1980 4085,1980 4195,2090 4300,2090 4330.51,2120.51 U1.31
NetR31_1: R31.1 U1.30 | length 406.9
  Top Layer w10: R31.1 4085.12,2110 4275,2110 4317.01,2152.01 U1.30
NetR35_1: R35.1 U7.1 | length 112.8
  Bottom Layer w10: U7.1 R35.1@2115.12,1300
NetR38_2: R38.2 R43.2 U4.6 | length 784.4
  Top Layer w10: R38.2 1845,1950.12 1845,1760 ; U4.6 1845,1760 ; R43.2 1845,1545 1845,1760
NetR43_1: R43.1 U4.1 U4.2 | length 162.4
  Top Layer w10: U4.1 U4.2 ; R43.1 U4.1@2180.12,1657.4
NetU1_19: U1.19 U2.5 | length 896.1
  Top Layer w10: U2.5 3861.02,2386.02 3930,2455 4275,2455 4335,2515 4515,2515 4542.01,2487.99 U1.19
NetU1_20: U1.20 U2.6 | length 824.9
  Top Layer w10: U2.6 3886.61,2381.61 3940,2435 4275,2435 4340,2500 4500,2500 4510.51,2489.49 U1.20
NetU1_21: U1.21 U2.7 | length 745.7
  Top Layer w10: U2.7 3912.2,2382.2 3950,2420 4280,2420 4345.98,2485.98 4464.02,2485.98 4479.02,2470.98 U1.21
NetU1_22: U1.22 U2.8 | length 626.2
  Top Layer w10: U2.8 3937.8,2377.8 3965,2405 4415.08,2405 U1.22
NetU1_23: U1.23 U2.9 | length 517.7
  Top Layer w10: U2.9 3963.39,2368.39 3985,2390 4365.04,2390 U1.23
NetU1_24: U1.24 U2.10 | length 482.8
  Top Layer w10: U2.10@3990,2287.09 3990,2355 4010,2375 4165,2375 4199.02,2340.98 U1.24
NetU1_25: U1.25 U2.11 | length 456.1
  Top Layer w10: U2.11@4015,2286.5 4015,2350 4025,2360 4150,2360 4200.51,2309.49 U1.25
NetU1_26: U1.26 U2.12 | length 429.3
  Top Layer w10: U2.12 4040.16,2344.84 4040,2345 4130,2345 4197.01,2277.99 U1.26
P_ON: D9.1 U1.11 | length 149.5
  Top Layer w10: U1.11 D9.1@4933.15,2478.19
POS: R33.1 U1.14 | length 267.7
  Top Layer w10: U1.14 4699.49,2704.37 R33.1
RESET: ISP.4 R15.2 U1.2 | length 1511.8
  Top Layer w10: U1.2 5389.02,2089.02 5453.03,2025 ISP.4 v1(5645,2025) ; v1(5950,2225) R15.2
  Bottom Layer w10: v1(5645,2025) 5750,2025 v1(5950,2225)
RESET_P: ISP.2 R22.2 U1.4 | length 1544.7
  Top Layer w10: U1.4 5262.01,2152.01 5515,2405 5980.12,2405 R22.2 ; 5339.55,2225 ISP.2
RIGHT: S2.2 U1.34 | length 2868.2
  Top Layer w10: v1(4305,1910) 4395,1910 4447.52,1962.52 U1.34
  Bottom Layer w10: S2.2 1980,2185 2255,1910 v1(4305,1910)
RS: R14.2 U1.44 | length 1944.1
  Top Layer w10: U1.44 4810.04,1945 4940,1945 5170,1715 5540,1715 5605,1780 v1(5605,1785) ; v1(6025,2355) R14.2
  Bottom Layer w10: v1(5605,1785) 5615,1785 6025,2195 v1(6025,2355)
RXD: R3.2 U1.9 | length 2075.5
  Top Layer w10: U1.9 5159.49,2309.49 5475,2625 5530,2625 5785,2880 5785,2999.88 6260,3474.88 R3.2
S0: R29.2 R44.2 U3.11 | length 1392.9
  Top Layer w10: R44.2 3385,2095 3325,2035 3055,2035 3040,2020 U3.11 3040,1855 3669.88,1855 3734.88,1920 R29.2@3780,1920
S1: R30.2 R45.2 U3.10 | length 1506.3
  Top Layer w10: R45.2 3515,2050 3470,2005 3105,2005 3090,1990 U3.10 3090,1870 3515,1870 3695,2050 3775,2050 3779.88,2054.88 R30.2@3779.88,2095
S2: R31.2 R46.2 U3.9 | length 1081.8
  Top Layer w10: U3.9 3544.49,1929.49 3645,2030 R46.2 3669.76,2155.12 R31.2
S_IN: D10.3 R27.1 R28.2 R32.1 U1.33 | length 3496.9
  Top Layer w10: R32.1 D10.3 ; R28.2 1960,2794.88 R27.1 ; v1(4235,2025) 4350.04,2025 U1.33
  Bottom Layer w10: v1(1960,2840) 1960,2750 2080,2630 2080,2245 2300,2025 v1(4235,2025)
TXD: R2.2 U1.10 | length 843.8
  Top Layer w10: U1.10 5100.98,2340.98 5429.88,2669.88 R2.2
UP: S5.2 U1.35 | length 3563.7
  Top Layer w10: v1(4240,1955) 4265,1980 4370,1980 4454.02,2064.02 4479.02,2064.02 U1.35
  Bottom Layer w10: S5.2 1560,2590 1610,2540 2040,2540 2040,2221.11 2316.11,1945 4105,1945 4115,1955 v1(4240,1955)
VCC: C8.2 C9.1 D10.2 D11.1 Q9.3 R5.2 R22.1 R23.1 R25.2 R27.2 U1.5 U1.17 U1.27 U1.38 U2.2 U5.1 U5.3 U6.1 U6.3 | length 13843.6
  Top Layer w10: R27.2 v1(2200,2760) 2235,2760 2242.4,2767.4 2242.4,2957.4 D10.2 ; U6.1 3622.6,3707.4 3692.4,3707.4 3697.4,3712.4 U6.3 ; U2.2 3784.25,2205.75 3834.25,2205.75 v1(3840,2200) ; v1(4285,2235) 4290,2235 4301.5,2246.5 U1.27 ; D11.1 4362.48,4070.59 4480,4070.59 ; C8.2 4480,4070.59 ; U1.38@4573.5,1981.59 U1.38 4573.5,1861.5 v1(4577.41,1857.59) 4610.03,1824.97 4730.12,1824.97 R25.2 ; v1(4590,2510) 4605,2495 U1.17 ; Q9.3 4670,3873.66 v1(4670,3955) C9.1 ; U1.5 5258.5,2183.5 5525,2450 5914.88,2450 R22.1 ; R5.2@4924.29,4070.59 C9.1 ; R22.1@6045.12,2580 v1(6145,2580) ; 4480,4070.59 C9.1
  Bottom Layer w10: v1(2200,2760) 2200,2585 2115,2500 2115,2285 2255,2145 3220,2145 3625,2550 3730,2550 3775,2505 3775,2440 3660,2325 3660,2250 3710,2200 v1(3840,2200) 4285,2200 ; v1(3695,3705) 3720,3705 4085,4070 v1(4400,4070) ; v1(4670,3955) 4595,3880 4595,3630 5095,3130 5095,2945 4975,2825 4680,2825 4590,2735 v1(4590,2510) 4400,2510 4285,2395 v1(4285,2235) 4285,2200 ; 5842.4,1652.6 U5.1 ; U5.3 5920.16,1730 5840,1730 ; R23.1 5840,1594.88 5840,1650 ; v1(6145,2580) 6145,2100 5840,1795 5840,1730 ; 4285,2200 4285,1985 4350,1920 4515,1920 v1(4577.41,1857.59) 5302.41,1857.59 5510,1650 5840,1650 ; 5840,1650 5840,1730
VCC_ON: Q7.1 R21.1 U1.42 | length 670.4
  Top Layer w10: U1.42 4699.49,1935.51 4750,1885 4890,1885 4955,1820 R21.1 4972.72,1622.4 Q7.1
X0: C41.1 R47.1 U3.13 | length 362.5
  Top Layer w10: U3.13 2940,2174.88 R47.1 C41.1
X1: C40.1 R49.1 U3.14 | length 383.2
  Top Layer w10: R49.1 C40.1 2835,2075 2890,2020 U3.14
X2: C39.1 R48.1 U3.15 | length 532.7
  Top Layer w10: R48.1 C39.1 2615,2080 2670,2025 2805,2025 2840,1990 U3.15
X3: C42.1 R50.1 U3.12 | length 494.4
  Top Layer w10: U3.12 2990,2030 3030,2070 3135,2070 3165,2100 R50.1 C42.1
X4: C28.2 R39.2 U3.1 | length 235.4
  Top Layer w10: C28.2 R39.2 U3.1@2790.12,1740.39
X5: C30.2 R42.2 U3.5 | length 304.5
  Top Layer w10: U3.5 2990,1644.88 R42.2 C30.2
X6: C29.2 R40.2 U3.2 | length 476.2
  Top Layer w10: C29.2 R40.2 2840,1444.88 U3.2
X7: R41.2 U3.4 | length 435.2
  Top Layer w10: U3.4 2940,1474.88 R41.2
XT1: C6.2 U1.8 U2.15 Y1.1 | length 3523.4
  Top Layer w10: U2.15 4303.94,2543.94 4335,2575 4600,2575 v1(4625,2600) ; U1.8 5212.99,2277.99 5500,2565 5570,2565 v1@5785,2780 ; Y1.1 6130,3001.02 C6.2
  Bottom Layer w10: v1(4625,2600) 4675,2600 4700,2575 5585,2575 v1(5795,2785) 5906.02,2785 Y1.1
pads on no net: D6-1.2 D6-2.2 D13.0 J5.MH1 LS020.8 MINI_USB.4 U2.3 U2.4 U2.13 U2.20 U7.5

## Text inside footprints (layer, text, board x,y; h text height)
BT1: Top Overlay "+" at 5482.72,3425.51 h45.28 r90